# Altium PCB PCB1.PcbDoc
Units mil, origin at the board's own origin, x right, y up, seen from the top; angles counter-clockwise.
Board outline 6000 x 4000 mil, 4 copper layers (Component Side, Ground Plane, Power Plane, Solder Side), stack 33.234 mil thick; 97 components, 107 nets, 611 pads, 29 vias.
Unrouted connection lines stored in the file: 230.
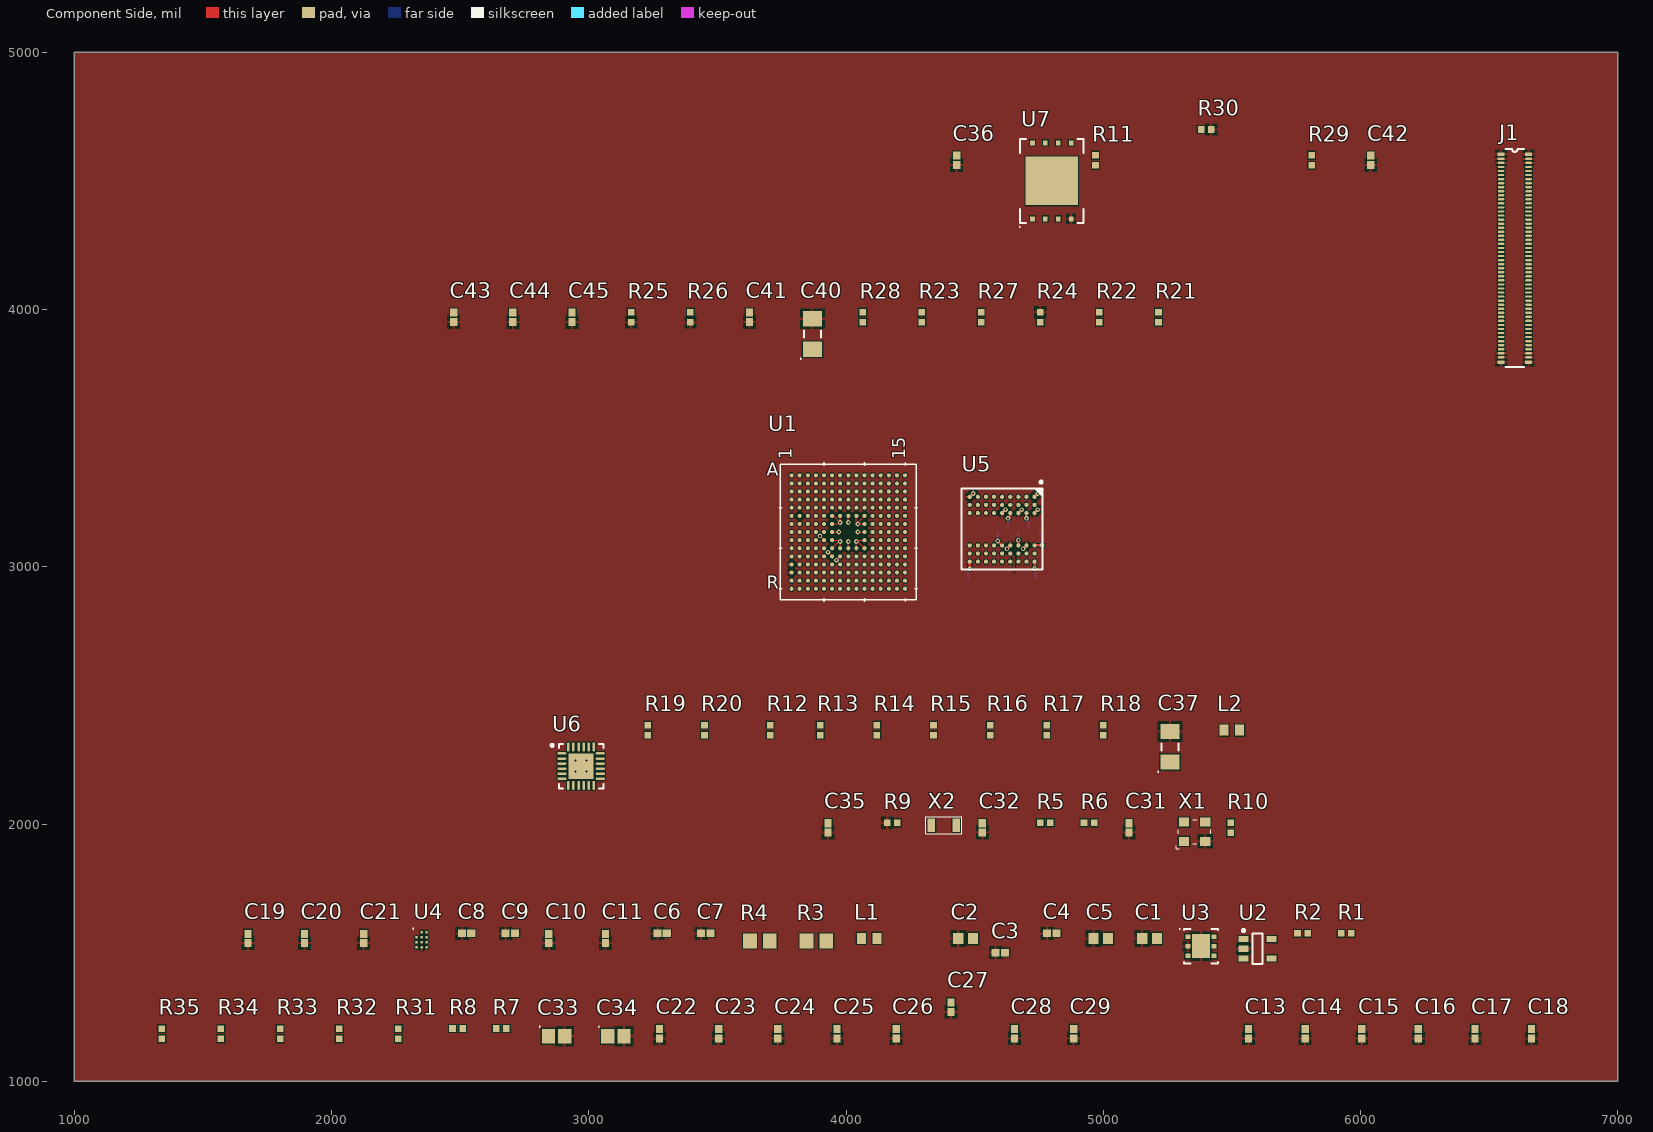
[diagram p0: Component Side view]
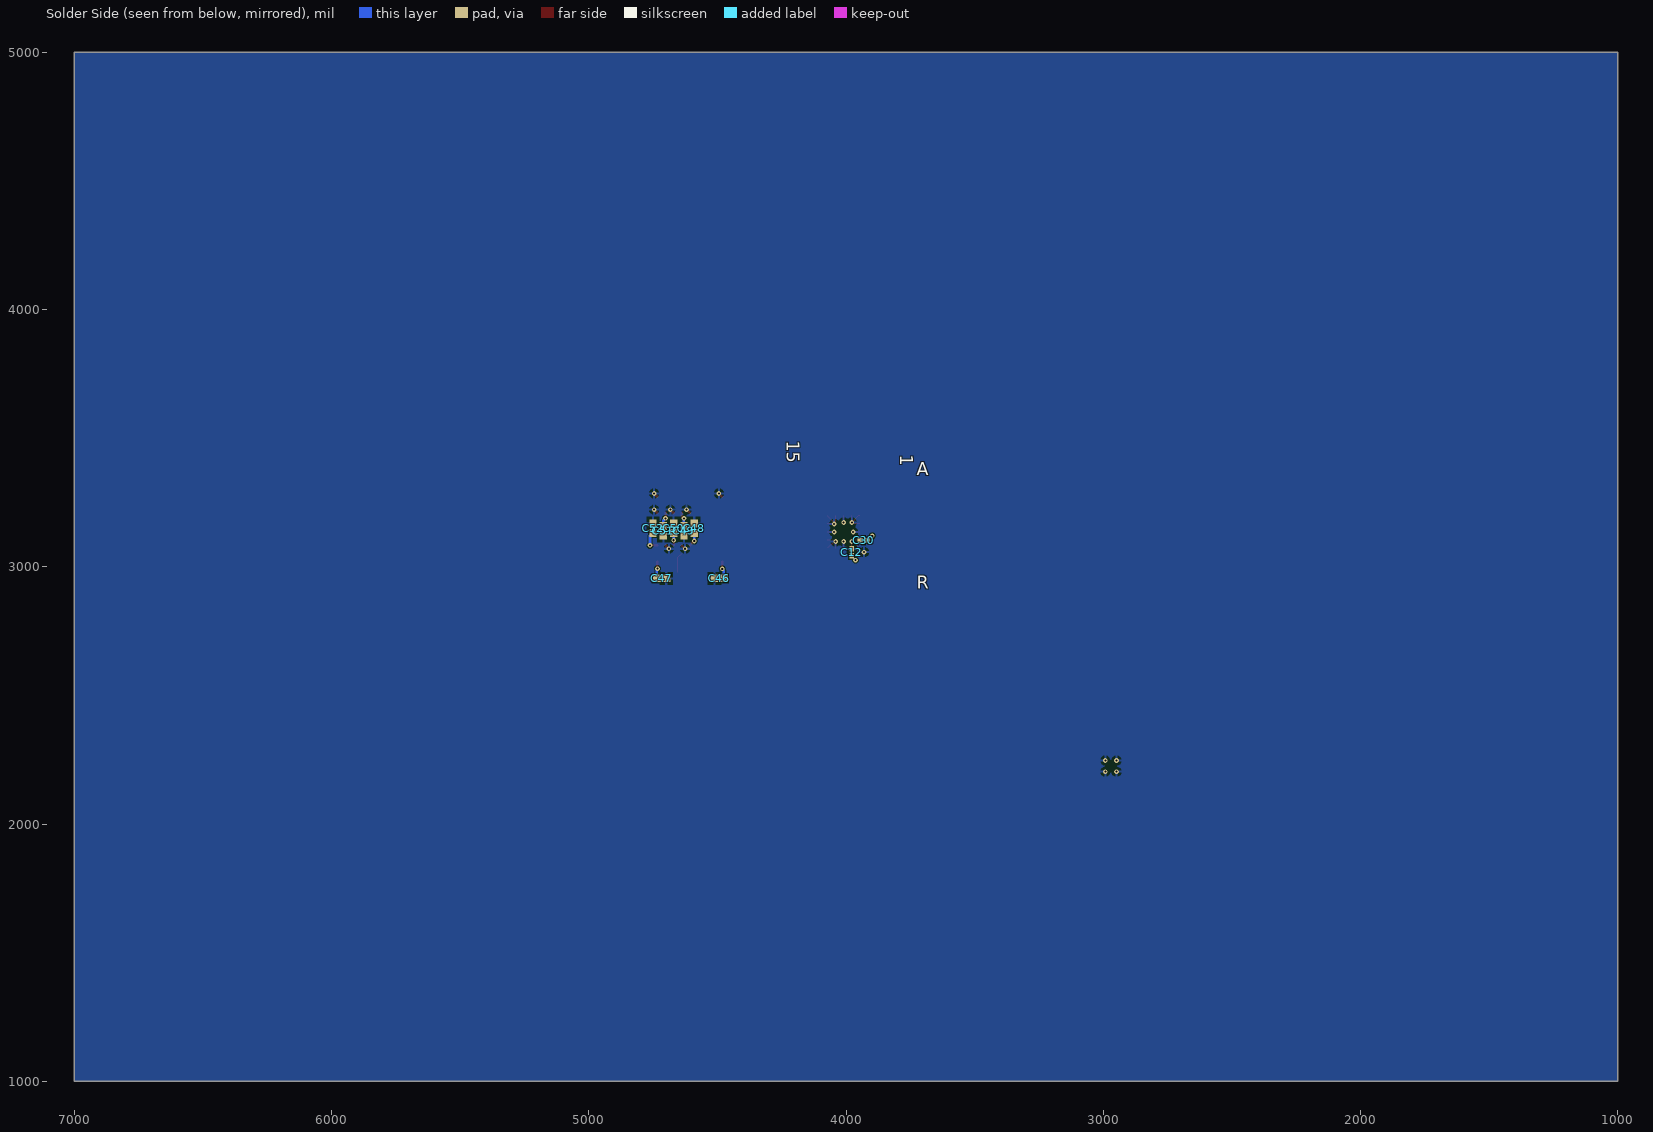
[diagram p1: Solder Side view, seen from below]
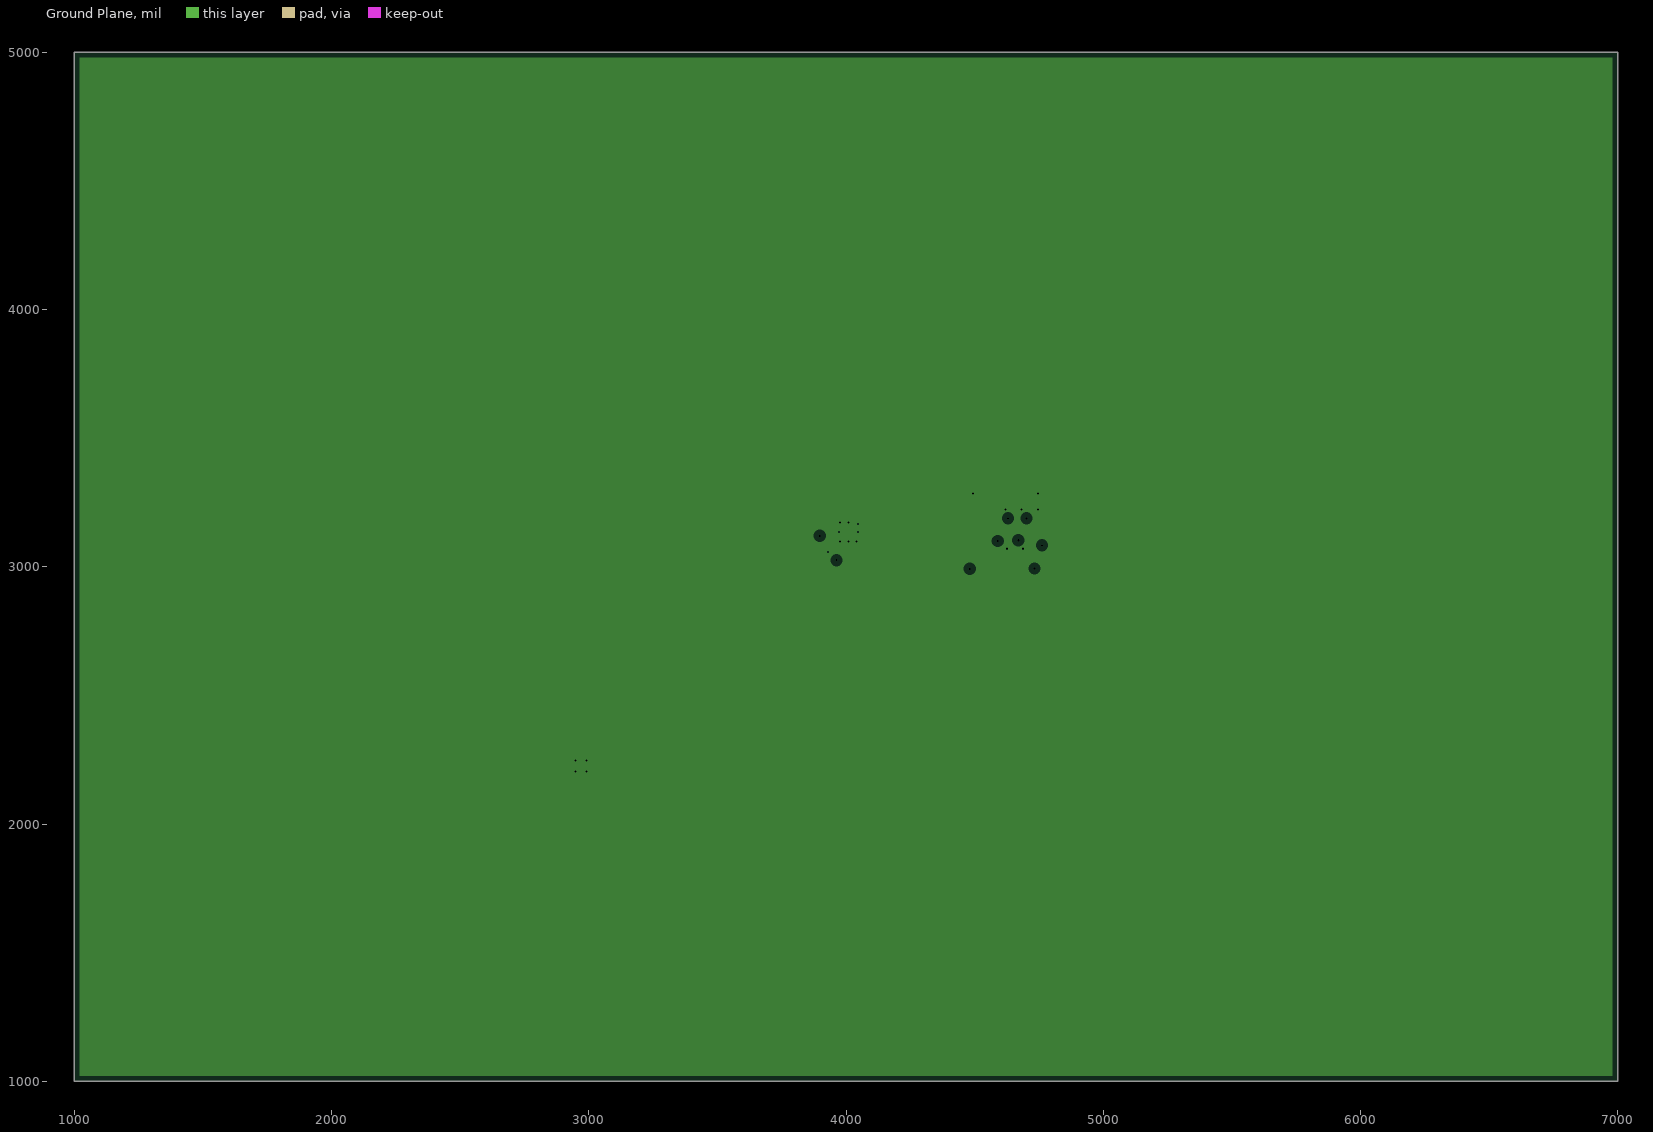
[diagram p2: Ground Plane, clearances drawn from the general rule]
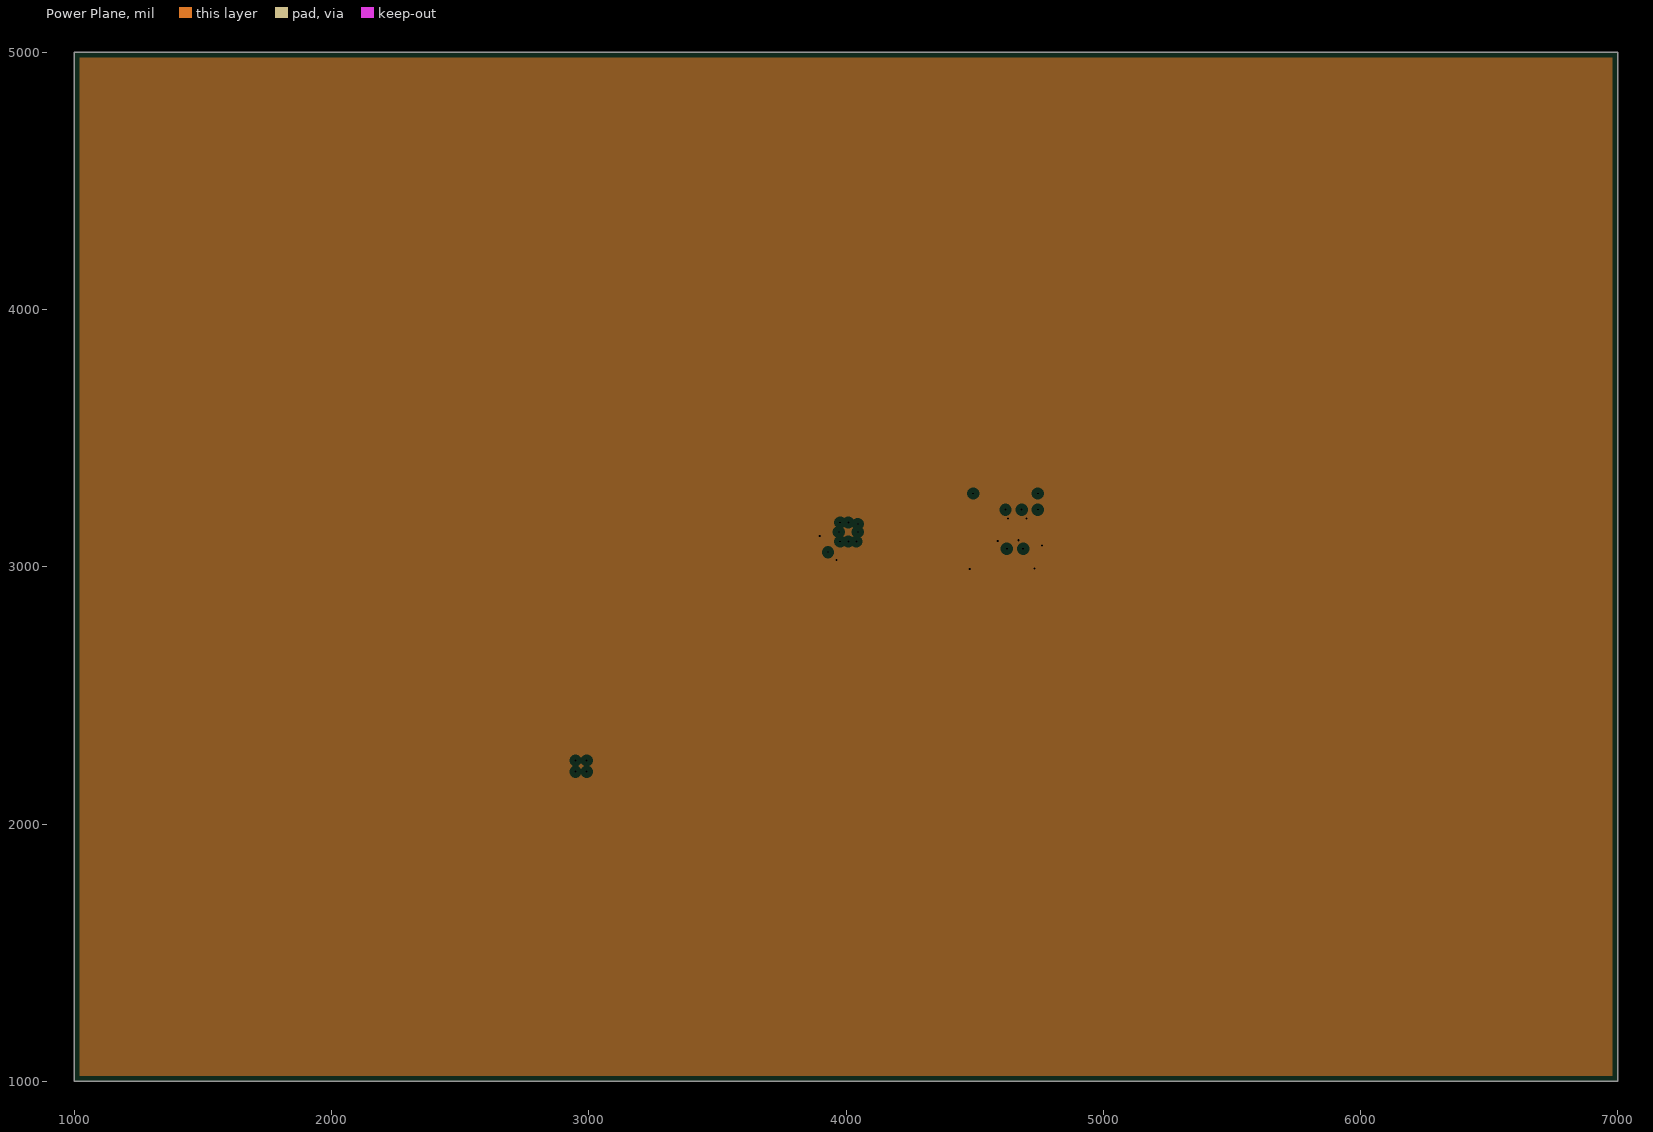
[diagram p3: Power Plane, clearances drawn from the general rule]

## Layer stack, top to bottom
Top Solder: solder mask 0.4, Solder Resist, Dk 3.5
Component Side: signal copper 1.4
Dielectric 1: core 12.6, FR-4, Dk 4.8
Ground Plane: plane copper 1.417, net GND
Dielectric 3: prepreg 5, Dk 4.2
Power Plane: plane copper 1.417, net 3.3V
Dielectric 4: core 10, Dk 4.2
Solder Side: signal copper 1.4
Bottom Solder: solder mask 0.4, Solder Resist, Dk 3.5

## Board outline
1000,1000 7000,1000 7000,5000 1000,5000

## Design rules (kind name [scope] priority, off if disabled: settings)
Clearance Clearance_BGA [WithinRoom('BGA')] p1: gap=4
Clearance [All] p2: gap=4
DiffPairsRouting [All] p1: maxlimit=10 minlimit=10 mostfreqgap=10 toplayer_minwidth=15 toplayer_maxwidth=15 toplayer_prefwidth=15 bottomlayer_minwidth=15 bottomlayer_maxwidth=15 bottomlayer_prefwidth=15 maxuncoupledlength=500
FanoutControl Fanout_BGA [IsBGA] p1: bgadir=Out bgaviamode=Centered fanoutstyle=BGA fanoutdirection=Alternating viagrid=1 // Fanout_BGA (Default Rule)
HoleSize [All] p1: absolutevalues=TRUE maxlimit=100 minlimit=8 maxpercent=80.000 minpercent=20.000
MinimumAnnularRing [All] p1: minimumring=5
MinimumSolderMaskSliver [All] p1: minsoldermaskwidth=4
PlaneClearance [All] p1: clearance=20
PlaneConnect [All] p1: planeconnectstyle=Relief reliefexpansion=20 reliefentries=4 reliefconductorwidth=10 reliefairgap=10
PolygonConnect [All] p1: connectstyle=Relief reliefconductorwidth=10 reliefentries=4 polygonreliefangle="90 Angle" airgapwidth=10
RoomDefinition BGA [InComponentClass('BGA_FANOUT')] p1: confinementstyle=ConfineIn formatcopy=TRUE lockcomponents=FALSE outline 3677,2853 4786,2853 4786,3507 3677,3507
RoutingVias RoutingVias_BGA [WithinRoom('BGA')] p1: holewidth=8 width=18 viastyle="Through Hole" minholewidth=8 minwidth=18 maxholewidth=8 maxwidth=18
RoutingVias [All] p2: holewidth=8 width=18 viastyle="Through Hole" minholewidth=8 minwidth=18 maxholewidth=28 maxwidth=50
SilkToSilkClearance [All] p1: silktosilkclearance=6
SilkToSolderMaskClearance [IsPad] p1: minsilkscreentomaskgap=0 clearancetoexposedcopper=TRUE
SolderMaskExpansion [All] p1: expansion=4
Width Width_BGA [WithinRoom('BGA')] p1: maxlimit=100 minlimit=4 preferedwidth=4
Width [All] p2: maxlimit=100 minlimit=4 preferedwidth=10
22 further rules are at their usual default settings.

## Classes and differential pairs
component class BGA_FANOUT: U1 U5
component class Sheet1: C1 C2 C3 C4 C5 C6 C7 C8 C9 C10 C11 C12 C13 C14 C15 C16 C17 C18 C19 C20 C21 C22 C23 C24 C25 C26 C27 C28 C29 C30 C33 C34 J1 L1 R1 R2 R3 R4 R7 R8 R31 R32 R33 R34 R35 U2 U3 U4
component class Sheet2: C31 C32 C35 R5 R6 R9 R10 U1 X1 X2
component class Sheet3: C36 C37 C40 C41 C42 C43 C44 C45 C46 C47 C48 C49 C50 C51 C52 L2 R11 R12 R13 R14 R15 R16 R17 R18 R19 R20 R21 R22 R23 R24 R25 R26 R27 R28 R29 R30 U5 U6 U7
net class FMC_A[0..12]: FMC_A0 FMC_A1 FMC_A2 FMC_A3 FMC_A4 FMC_A5 FMC_A6 FMC_A7 FMC_A8 FMC_A9 FMC_A10 FMC_A11 FMC_A12
net class FMC_D[0..15]: FMC_D0 FMC_D1 FMC_D2 FMC_D3 FMC_D4 FMC_D5 FMC_D6 FMC_D7 FMC_D8 FMC_D9 FMC_D10 FMC_D11 FMC_D12 FMC_D13 FMC_D14 FMC_D15
differential pair ETH_RX: +ETH_RX_P -ETH_RX_N
differential pair ETH_TX: +ETH_TX_P -ETH_TX_N
differential pair OTG: +OTG_P -OTG_N

## Components (designator, comment, footprint, x,y, rotation, side; value= is the part's Value field where it differs from the comment)
C1 "4.7uF" CAP0603X055M 5180,1555 r0 top
C2 "1uF 16v" CAP0603X055M 4465,1555 r0 top
C3 "100nF" CAP0402X04M 4600,1500 r0 top
C4 "100nF" CAP0402X04M 4800,1575 r0 top
C5 "1uF 16v" CAP0603X055M 4990,1555 r0 top
C6 "1uF" CAP0402X04M 3285,1575 r0 top
C7 "100nF" CAP0402X04M 3455,1575 r0 top
C8 "1uF" CAP0402X04M 2525,1575 r0 top
C9 "100nF" CAP0402X04M 2695,1575 r0 top
C10 "2.2uF" CAP0402X04M 2845,1555 r90 top
C11 "2.2uF" CAP0402X04M 3065,1555 r90 top
C12 "100nF" RES0201X026M#1 3978,3056 r90 bottom
C13 "100nF" CAP0402X04M 5565,1185 r90 top
C14 "100nF" CAP0402X04M 5785,1185 r90 top
C15 "100nF" CAP0402X04M 6005,1185 r90 top
C16 "100nF" CAP0402X04M 6225,1185 r90 top
C17 "100nF" CAP0402X04M 6445,1185 r90 top
C18 "100nF" CAP0402X04M 6665,1185 r90 top
C19 "100nF" CAP0402X04M 1675,1555 r90 top
C20 "100nF" CAP0402X04M 1895,1555 r90 top
C21 "100nF" CAP0402X04M 2125,1555 r90 top
C22 "100nF" CAP0402X04M 3275,1185 r90 top
C23 "100nF" CAP0402X04M 3505,1185 r90 top
C24 "100nF" CAP0402X04M 3735,1185 r90 top
C25 "100nF" CAP0402X04M 3965,1185 r90 top
C26 "100nF" CAP0402X04M 4195,1185 r90 top
C27 "100nF" CAP0402X04M 4408,1288 r90 top
C28 "100nF" CAP0402X04M 4655,1185 r90 top
C29 "100nF" CAP0402X04M 4885,1185 r90 top
C30 "100nF" RES0201X026M#2 3931,3103 r180 bottom
C31 "10nF" CAP0402X04M 5100,1985 r90 top
C32 "4.7pF +-0.25pF" CAP0402X04M 4530,1985 r90 top
C33 "4.7uF" CAPPOL0805X07N 2875,1175 r0 top
C34 "4.7uF" CAPPOL0805X07N 3105,1175 r0 top
C35 "4.7pF +-0.25pF" CAP0402X04M 3930,1985 r90 top
C36 "100nF" CAP0402X04M 4430,4580 r90 top
C37 "10uF" CAPPOL1206X07M 5260,2300 r90 top
C40 "10uF" CAPPOL1206X07M 3870,3905 r90 top
C41 "100nF" CAP0402X04M 3625,3970 r90 top
C42 "470pf" CAP0402X04M 6040,4580 r90 top
C43 "1uF" CAP0402X04M 2475,3970 r90 top
C44 "100nF" CAP0402X04M 2705,3970 r90 top
C45 "100nF" CAP0402X04M 2935,3970 r90 top
C46 "100nF" CAP0402X04M 4493.11,2955 r0 bottom
C47 "100nF" CAP0402X04M 4716.89,2955 r180 bottom
C48 "100nF" CAP0402X04M 4590,3150 r90 bottom
C49 "100nF" CAP0402X04M 4630,3140 r270 bottom
C50 "100nF" CAP0402X04M 4670,3150 r90 bottom
C51 "100nF" CAP0402X04M 4710,3140 r270 bottom
C52 "100nF" CAP0402X04M 4750,3150 r90 bottom
J1 "DF40C-100DP-0.4V(51)" DF40C-100DP-0.4V(51) 6600,4200 r0 top
L1 "BEAD 600 Ohm" IND0603X055M 4090,1555 r0 top
L2 "Bead 120 Ohm" IND0603X055M 5500,2365 r0 top
R1 "47k 1%" RES0402X04M 5945,1575 r0 top
R2 "10k" RES0402X04M 5775,1575 r0 top
R3 "0" RES0805X07M 3885,1545 r0 top
R4 "0" RES0805X07M 3665,1545 r0 top
R5 "10k" RES0402X04M 4775,2005 r0 top
R6 "10k" RES0402X04M 4945,2005 r0 top
R7 "47k 1%" RES0402X04M 2660,1205 r0 top
R8 "47k 1%" RES0402X04M 2490,1205 r0 top
R9 "10k" RES0402X04M 4180,2005 r0 top
R10 "100 1%" RES0402X04M 5495,1985 r90 top
R11 "10k" RES0402X04M 4970,4580 r90 top
R12 "1K5" RES0402X04M 3705,2365 r90 top
R13 "4K7" RES0402X04M 3900,2365 r90 top
R14 "4K7" RES0402X04M 4120,2365 r90 top
R15 "49.9 1%" RES0402X04M 4340,2365 r90 top
R16 "49.9 1%" RES0402X04M 4560,2365 r90 top
R17 "49.9 1%" RES0402X04M 4780,2365 r90 top
R18 "49.9 1%" RES0402X04M 5000,2365 r90 top
R19 "4K7" RES0402X04M 3230,2365 r90 top
R20 "4K7" RES0402X04M 3450,2365 r90 top
R21 "33" RES0402X04M 5215,3970 r90 top
R22 "33" RES0402X04M 4985,3970 r90 top
R23 "33" RES0402X04M 4295,3970 r90 top
R24 "12K1" RES0402X04M 4755,3970 r90 top
R25 "10k" RES0402X04M 3165,3970 r90 top
R26 "10k" RES0402X04M 3395,3970 r90 top
R27 "330" RES0402X04M 4525,3970 r90 top
R28 "330" RES0402X04M 4065,3970 r90 top
R29 "100 1%" RES0402X04M 5810,4580 r90 top
R30 "4K7" RES0402X04M 5400,4700 r180 top
R31 "47k 1%" RES0402X04M 2260,1185 r90 top
R32 "47k 1%" RES0402X04M 2030,1185 r90 top
R33 "47k 1%" RES0402X04M 1800,1185 r90 top
R34 "2K7" RES0402X04M 1570,1185 r90 top
R35 "2K7" RES0402X04M 1340,1185 r90 top
U1 "STM32F74XNXH" TFBGA-216_13X13 4009,3135 r0 top
U2 "STMPS2141STR" SOT95P280X145-5N 5600,1515 r0 top
U3 "LD39050PU33R" LD39050 5380,1525 r0 top
U4 "EMIF02-USB03F2" EMIF02-USB03F2 2350,1550 r0 top
U5 "AS4C16M16SA-6BIN" BGA100P9X9-54A 4607.05,3145.97 r270 top
U6 "LAN8742A-CZ" QFN50P400X400X100_HS-25N 2970,2225 r0 top
U7 "N25Q256A13EF840E" SON127P800X100_HS-9N 4800,4500 r90 top
X1 "OSC 25.0Mhz" OSC_3.2X2.5 5355,1970 r0 top
X2 "32.768k 6pF +-20ppm" CRYSTAL_3.20X1.50 4380,1995 r0 top

## Footprints (in the part's own frame and the unit in brackets; to place one, negate y for a bottom-side part, rotate by r counter-clockwise, add the part's x,y. Pads: shape width x height; smd on the part's side, far side on the other; paste and mask are expansions set on the pad)
BGA100P9X9-54A [mm]
  round 0.41 smd: A1(-3.2,3.2) A2(-2.4,3.2) A3(-1.6,3.2) A7(1.6,3.2) A8(2.4,3.2) A9(3.2,3.2) B1(-3.2,2.4) B2(-2.4,2.4) B3(-1.6,2.4) B7(1.6,2.4) B8(2.4,2.4) B9(3.2,2.4) C1(-3.2,1.6) C2(-2.4,1.6) C3(-1.6,1.6) C7(1.6,1.6) C8(2.4,1.6) C9(3.2,1.6) D1(-3.2,0.8) D2(-2.4,0.8) D3(-1.6,0.8) D7(1.6,0.8) D8(2.4,0.8) D9(3.2,0.8) E1(-3.2,0) E2(-2.4,0) E3(-1.6,0) E7(1.6,0) E8(2.4,0) E9(3.2,0) F1(-3.2,-0.8) F2(-2.4,-0.8) F3(-1.6,-0.8) F7(1.6,-0.8) F8(2.4,-0.8) F9(3.2,-0.8) G1(-3.2,-1.6) G2(-2.4,-1.6) G3(-1.6,-1.6) G7(1.6,-1.6) G8(2.4,-1.6) G9(3.2,-1.6) H1(-3.2,-2.4) H2(-2.4,-2.4) H3(-1.6,-2.4) H7(1.6,-2.4) H8(2.4,-2.4) H9(3.2,-2.4) J1(-3.2,-3.2) J2(-2.4,-3.2) J3(-1.6,-3.2) J7(1.6,-3.2) J8(2.4,-3.2) J9(3.2,-3.2)
  silkscreen extent -4.77,-4 4,4, body extent -4,-4 4,4, height 1.2
CAP0402X04M [mm] "Chip Capacitor, 2-Leads, Body 1.00x0.50mm, IPC Low Density"
  rect 0.8x0.72 smd: 1(-0.46,0) 2(0.46,0)
  body extent -0.53,-0.28 0.53,0.27, height 0.55
CAP0603X055M [mm] "Chip Capacitor, 2-Leads, Body 1.60x0.80mm, IPC Low Density"
  rect 1x1.1 smd: 1(-0.725,0) 2(0.725,0)
  body extent -0.87,-0.48 0.87,0.47, height 0.95
CAPPOL0805X07N [mm] "Chip Capacitor, 2-Leads, Body 2.00x1.25mm, IPC Medium Density"
  rect 1.3x1.45 smd mask+0: 1(-0.8,0) 2(0.8,0)
  silkscreen extent -1.71,0.89 -1.61,0.99, body extent -1.1,-0.72 1.1,0.72, height 1.45
CAPPOL1206X07M [mm] "Chip Capacitor, 2-Leads, Body 3.20x1.60mm, IPC Low Density"
  rect 1.5x1.9 smd: 1(-1.5,0) 2(1.5,0)
  silkscreen extent -2.51,-0.85 0.35,1.21, body extent -1.7,-0.9 1.7,0.9, height 1.8
CRYSTAL_3.20X1.50 [mm]
  rect 0.75x1.3 smd: 1(-1.225,0) 2(1.225,0)
  silkscreen extent -1.8,-0.85 1.8,0.85
DF40C-100DP-0.4V(51) [mm]
  rect 0.66x0.23 smd: 1(-1.355,9.8)
  oval 0.66x0.23 smd: 2(-1.355,9.4) 3(-1.355,9) 4(-1.355,8.6) 5(-1.355,8.2) 6(-1.355,7.8) 7(-1.355,7.4) 8(-1.355,7) 9(-1.355,6.6) 10(-1.355,6.2) 11(-1.355,5.8) 12(-1.355,5.4) 13(-1.355,5) 14(-1.355,4.6) 15(-1.355,4.2) 16(-1.355,3.8) 17(-1.355,3.4) 18(-1.355,3) 19(-1.355,2.6) 20(-1.355,2.2) 21(-1.355,1.8) 22(-1.355,1.4) 23(-1.355,1) 24(-1.355,0.6) 25(-1.355,0.2) 26(-1.355,-0.2) 27(-1.355,-0.6) 28(-1.355,-1) 29(-1.355,-1.4) 30(-1.355,-1.8) 31(-1.355,-2.2) 32(-1.355,-2.6) 33(-1.355,-3) 34(-1.355,-3.4) 35(-1.355,-3.8) 36(-1.355,-4.2) 37(-1.355,-4.6) 38(-1.355,-5) 39(-1.355,-5.4) 40(-1.355,-5.8) 41(-1.355,-6.2) 42(-1.355,-6.6) 43(-1.355,-7) 44(-1.355,-7.4) 45(-1.355,-7.8) 46(-1.355,-8.2) 47(-1.355,-8.6) 48(-1.355,-9) 49(-1.355,-9.4) 50(-1.355,-9.8) 51(1.355,-9.8) 52(1.355,-9.4) 53(1.355,-9) 54(1.355,-8.6) 55(1.355,-8.2) 56(1.355,-7.8) 57(1.355,-7.4) 58(1.355,-7) 59(1.355,-6.6) 60(1.355,-6.2) 61(1.355,-5.8) 62(1.355,-5.4) 63(1.355,-5) 64(1.355,-4.6) 65(1.355,-4.2) 66(1.355,-3.8) 67(1.355,-3.4) 68(1.355,-3) 69(1.355,-2.6) 70(1.355,-2.2) 71(1.355,-1.8) 72(1.355,-1.4) 73(1.355,-1) 74(1.355,-0.6) 75(1.355,-0.2) 76(1.355,0.2) 77(1.355,0.6) 78(1.355,1) 79(1.355,1.4) 80(1.355,1.8) 81(1.355,2.2) 82(1.355,2.6) 83(1.355,3) 84(1.355,3.4) 85(1.355,3.8) 86(1.355,4.2) 87(1.355,4.6) 88(1.355,5) 89(1.355,5.4) 90(1.355,5.8) 91(1.355,6.2) 92(1.355,6.6) 93(1.355,7) 94(1.355,7.4) 95(1.355,7.8) 96(1.355,8.2) 97(1.355,8.6) 98(1.355,9) 99(1.355,9.4) 100(1.355,9.8)
  rect 0.66x0.35 smd: 101(-1.355,-10.275) 101(-1.355,10.275) 101(1.355,-10.275) 101(1.355,10.275)
  silkscreen extent -0.92,-10.76 0.92,10.76
EMIF02-USB03F2 [mm] "BGA, 12-Leads, Body 1.44x1.94mmx0.65mm, Pitch 0.50mm Pin A1 Removed"
  round 0.26 smd mask+0.06: A2(0,0.75) A3(0.5,0.75) B1(-0.5,0.25) B2(0,0.25) B3(0.5,0.25) C1(-0.5,-0.25) C2(0,-0.25) C3(0.5,-0.25) D1(-0.5,-0.75) D2(0,-0.75) D3(0.5,-0.75)
  silkscreen extent -0.87,1.03 -0.77,1.12, body extent -1.22,-1.22 0.22,0.72, height 0.65
IND0603X055M [mm] "Chip Inductor, 2-Leads, Body 1.60x0.80mm, IPC Low Density"
  rect 0.87x1.08 smd: 1(-0.765,0) 2(0.765,0)
  body extent -0.87,-0.48 0.87,0.47, height 0.95
LD39050 [mm] "SON, 6-Leads, Body 3.00x3.00mm, Pitch 0.95mm, Thermal Pad 2.37x1.49mm, IPC Medium Density"
  rect 0.5x0.45 smd mask+0: 1(-1.3,0.95) 2(-1.3,0) 3(-1.3,-0.95) 4(1.3,-0.95) 5(1.3,0) 6(1.3,0.95)
  rect 1.75x2.37 smd mask+0: 7(0,0)
  silkscreen extent -2.15,-1.7 1.7,1.75, body extent -1.55,-1.55 1.55,1.55, height 1
OSC_3.2X2.5 [mm]
  rect 1x0.9 smd: 1(-1.05,-0.95) 2(1.05,-0.95) 3(1.05,0.95) 4(-1.05,0.95)
  silkscreen extent -1.8,-1.7 1.6,1.2
QFN50P400X400X100_HS-25N [mm] "QFN, 24-Leads, Body 4.00x4.00mm, Pitch 0.50mm, Thermal Pad 2.50x2.50mm, IPC Medium Density"
  oval 0.9x0.25 smd mask+0: 1(-1.9,1.25) 2(-1.9,0.75) 3(-1.9,0.25) 4(-1.9,-0.25) 5(-1.9,-0.75) 6(-1.9,-1.25) 13(1.9,-1.25) 14(1.9,-0.75) 15(1.9,-0.25) 16(1.9,0.25) 17(1.9,0.75) 18(1.9,1.25)
  oval 0.25x0.9 smd mask+0: 7(-1.25,-1.9) 8(-0.75,-1.9) 9(-0.25,-1.9) 10(0.25,-1.9) 11(0.75,-1.9) 12(1.25,-1.9) 19(1.25,1.9) 20(0.75,1.9) 21(0.25,1.9) 22(-0.25,1.9) 23(-0.75,1.9) 24(-1.25,1.9)
  rect 2.5x2.5 smd mask+0: 25(0,0)
  silkscreen extent -2.97,-2.2 2.2,2.2, body extent -2.05,-2.05 2.05,2.05, height 1
RES0201X026M#1 [mm] "Chip Resistor, 2-Leads, Body 0.60x0.30mm, IPC Low Density"
  rect 0.55x0.45 smd: 1(0.35,0) 2(-0.35,0)
  body extent -0.32,-0.16 0.31,0.17, height 0.26
RES0201X026M#2 [mm] "Chip Resistor, 2-Leads, Body 0.60x0.30mm, IPC Low Density"
  rect 0.55x0.45 smd: 1(-0.35,0) 2(0.35,0)
  body extent -0.31,-0.16 0.32,0.17, height 0.26
RES0402X04M [mm] "Chip Resistor, 2-Leads, Body 1.00x0.50mm, IPC Low Density"
  rect 0.65x0.65 smd: 1(-0.5,0) 2(0.5,0)
  body extent -0.53,-0.27 0.53,0.28, height 0.4
RES0805X07M [mm] "Chip Resistor, 2-Leads, Body 2.00x1.25mm, IPC Low Density"
  rect 1.35x1.45 smd: 1(-0.975,0) 2(0.975,0)
  body extent -1.1,-0.67 1.1,0.67, height 0.7
SON127P800X100_HS-9N [mm] "SON, 8-Leads, Body 6.00x8.00mm, Pitch 1.27mm, Thermal Pad 2.37x1.49mm, IPC Medium Density"
  rect 0.5x0.45 smd: 1(-3.75,1.905) 2(-3.75,0.635) 3(-3.75,-0.635) 4(-3.75,-1.905) 5(3.75,-1.905) 6(3.75,-0.635) 7(3.75,0.635) 8(3.75,1.905)
  rect 4.8x5.16 smd: 9(0,0)
  silkscreen extent -4.6,-3.15 4.15,3.2, body extent -4,-3 4,3, height 1
SOT95P280X145-5N [mm] "SOT23, 5-Leads, Body 2.90x2.80mm, Pitch 0.95mm, IPC Medium Density"
  rect 1x0.6 smd: 1(-1.375,0.95) 2(-1.375,0) 3(-1.375,-0.95) 4(1.375,-0.95) 5(1.375,0.95)
  silkscreen extent -1.5,-1.5 0.5,1.92, body extent -0.88,-1.5 0.87,1.5, height 1.45
TFBGA-216_13X13 [mm]
  round 0.4 smd paste-0.2 mask+0.038: A1(-5.601,5.6) A2(-4.801,5.6) A3(-4,5.6) A4(-3.2,5.6) A5(-2.4,5.6) A6(-1.6,5.6) A7(-0.8,5.6) A8(0,5.6) A9(0.8,5.6) A10(1.6,5.6) A11(2.4,5.6) A12(3.2,5.6) A13(4,5.6) A14(4.801,5.6) A15(5.601,5.6) B1(-5.601,4.8) B2(-4.801,4.8) B3(-4,4.8) B4(-3.2,4.8) B5(-2.4,4.8) B6(-1.6,4.8) B7(-0.8,4.8) B8(0,4.8) B9(0.8,4.8) B10(1.6,4.8) B11(2.4,4.8) B12(3.2,4.8) B13(4,4.8) B14(4.801,4.8) B15(5.601,4.8) C1(-5.601,4) C2(-4.801,4) C3(-4,4) C4(-3.2,4) C5(-2.4,4) C6(-1.6,4) C7(-0.8,4) C8(0,4) C9(0.8,4) C10(1.6,4) C11(2.4,4) C12(3.2,4) C13(4,4) C14(4.801,4) C15(5.601,4) D1(-5.601,3.2) D2(-4.801,3.2) D3(-4,3.2) D4(-3.2,3.2) D5(-2.4,3.2) D6(-1.6,3.2) D7(-0.8,3.2) D8(0,3.2) D9(0.8,3.2) D10(1.6,3.2) D11(2.4,3.2) D12(3.2,3.2) D13(4,3.2) D14(4.801,3.2) D15(5.601,3.2) E1(-5.601,2.4) E2(-4.801,2.4) E3(-4,2.4) E4(-3.2,2.4) E5(-2.4,2.4) E6(-1.6,2.4) E7(-0.8,2.4) E8(0,2.4) E9(0.8,2.4) E10(1.6,2.4) E11(2.4,2.4) E12(3.2,2.4) E13(4,2.4) E14(4.801,2.4) E15(5.601,2.4) F1(-5.601,1.6) F2(-4.801,1.6) F3(-4,1.6) F4(-3.2,1.6) F5(-2.4,1.6) F6(-1.6,1.6) F7(-0.8,1.6) F8(0,1.6) F9(0.8,1.6) F10(1.6,1.6) F11(2.4,1.6) F12(3.2,1.6) F13(4,1.6) F14(4.801,1.6) F15(5.601,1.6) G1(-5.601,0.8) G2(-4.801,0.8) G3(-4,0.8) G4(-3.2,0.8) G5(-2.4,0.8) G6(-1.6,0.8) G10(1.6,0.8) G11(2.4,0.8) G12(3.2,0.8) G13(4,0.8) G14(4.801,0.8) G15(5.601,0.8) H1(-5.601,0) H2(-4.801,0) H3(-4,0) H4(-3.2,0) H5(-2.4,0) H6(-1.6,0) H10(1.6,0) H11(2.4,0) H12(3.2,0) H13(4,0) H14(4.801,0) H15(5.601,0) J1(-5.601,-0.8) J2(-4.801,-0.8) J3(-4,-0.8) J4(-3.2,-0.8) J5(-2.4,-0.8) J6(-1.6,-0.8) J10(1.6,-0.8) J11(2.4,-0.8) J12(3.2,-0.8) J13(4,-0.8) J14(4.801,-0.8) J15(5.601,-0.8) K1(-5.601,-1.6) K2(-4.801,-1.6) K3(-4,-1.6) K4(-3.2,-1.6) K5(-2.4,-1.6) K6(-1.6,-1.6) K7(-0.8,-1.6) K8(0,-1.6) K9(0.8,-1.6) K10(1.6,-1.6) K11(2.4,-1.6) K12(3.2,-1.6) K13(4,-1.6) K14(4.801,-1.6) K15(5.601,-1.6) L1(-5.601,-2.4) L2(-4.801,-2.4) L3(-4,-2.4) L4(-3.2,-2.4) L5(-2.4,-2.4) L6(-1.6,-2.4) L7(-0.8,-2.4) L8(0,-2.4) L9(0.8,-2.4) L10(1.6,-2.4) L11(2.4,-2.4) L12(3.2,-2.4) L13(4,-2.4) L14(4.801,-2.4) L15(5.601,-2.4) M1(-5.601,-3.2) M2(-4.801,-3.2) M3(-4,-3.2) M4(-3.2,-3.2) M5(-2.4,-3.2) M6(-1.6,-3.2) M7(-0.8,-3.2) M8(0,-3.2) M9(0.8,-3.2) M10(1.6,-3.2) M11(2.4,-3.2) M12(3.2,-3.2) M13(4,-3.2) M14(4.801,-3.2) M15(5.601,-3.2) N1(-5.601,-4) N2(-4.801,-4) N3(-4,-4) N4(-3.2,-4) N5(-2.4,-4) N6(-1.6,-4) N7(-0.8,-4) N8(0,-4) N9(0.8,-4) N10(1.6,-4) N11(2.4,-4) N12(3.2,-4) N13(4,-4) N14(4.801,-4) N15(5.601,-4) P1(-5.601,-4.8) P2(-4.801,-4.8) P3(-4,-4.8) P4(-3.2,-4.8) P5(-2.4,-4.8) P6(-1.6,-4.8) P7(-0.8,-4.8) P8(0,-4.8) P9(0.8,-4.8) P10(1.6,-4.8) P11(2.4,-4.8) P12(3.2,-4.8) P13(4,-4.8) P14(4.801,-4.8) P15(5.601,-4.8) R1(-5.601,-5.6) R2(-4.801,-5.6) R3(-4,-5.6) R4(-3.2,-5.6) R5(-2.4,-5.6) R6(-1.6,-5.6) R7(-0.8,-5.6) R8(0,-5.6) R9(0.8,-5.6) R10(1.6,-5.6) R11(2.4,-5.6) R12(3.2,-5.6) R13(4,-5.6) R14(4.801,-5.6) R15(5.601,-5.6)
  silkscreen extent -6.83,-6.83 6.83,6.83, body extent -6.58,-6.58 6.58,6.58, height 1.09

## Part data
C1: library part CL10A475MP5LNNC, "CAP CER 4.7UF 10V X5R 0603"
C2 C5: library part CC0603ZRY5V7BB105, "CAP CER 1UF 16V Y5V 0603"
C3 C4 C7 C9 C12 C13 C14 C15 C16 C17 C18 C19 C20 C21 C22 C23 C24 C25 C26 C27 C28 C29 C30 C36 C41 C44 C45 C46 C47 C48 C49 C50 C51 C52: library part GRM155R71C104KA88J, "CAP CER 0.1UF 16V X7R 0402"
C6 C8 C43: library part GRM155R60J105KE19D, "CAP CER 1UF 6.3V X5R 0402"
C10 C11: library part 04026D225KAT2A, "CAP CER 2.2UF 6.3V X5R 0402"
C31: library part GRM155R71H103KA88D, "CAP CER 10000PF 50V X7R 0402"
C32 C35: library part CL05C4R7CB5NNNC, "CAP CER 4.7PF 50V NP0 0402"
C33 C34: library part F921A475MPA, "CAP TANT 4.7UF 10V 20% 0805"
C37 C40: library part 293D106X9010A2TE3, "CAP TANT 10UF 10V 10% 1206"
C42: library part CL05B471KB5NNNC, "CAP CER 470PF 50V X7R 0402"
J1: "CONN HDR 100POS 0.4MM SMD GOLD"
L1: library part BK1608HW601-T, "FERRITE BEAD 600 OHM 0603 1LN"
L2: library part BLM18PG121SN1D, "FERRITE BEAD 120 OHM 0603 1LN"
R1 R7 R8 R31 R32 R33: library part ERJ-2RKF4702X, "RES SMD 47K OHM 1% 1/10W 0402"
R2 R5 R6 R9 R11 R25 R26: library part RC0402FR-0710KL, "RES SMD 10K OHM 1% 1/16W 0402"
R3 R4: library part RC0805JR-070RL, "RES SMD 0.0 OHM JUMPER 1/8W 0805"
R10 R29: library part RC0402FR-07100RL, "RES SMD 100 OHM 1% 1/16W 0402"
R12: library part ERJ-2RKF1501X, "RES SMD 1.5K OHM 1% 1/10W 0402"
R13 R14 R19 R20 R30: library part ERJ-2RKF4701X, "RES SMD 4.7K OHM 1% 1/10W 0402"
R15 R16 R17 R18: library part RC0402FR-0749R9L, "RES SMD 49.9 OHM 1% 1/16W 0402"
R21 R22 R23: library part ERJ-2RKF33R0X, "RES SMD 33 OHM 1% 1/10W 0402"
R24: library part ERJ-2RKF1212X, "RES SMD 12.1K OHM 1% 1/10W 0402"
R27 R28: library part ERJ-2RKF3300X, "RES SMD 330 OHM 1% 1/10W 0402"
R34 R35: library part ERJ-2RKF2701X, "RES SMD 2.7K OHM 1% 1/10W 0402"
U1: "Imported"
U2: "IC PWR SWITCH 1CH 500MA SOT23-5"
U3: "IC REG LDO 3.3V 0.5A 6DFN"
U4: "FILTER RC(PI) 33 OHM/20PF SMD"
U5: "IC SDRAM 256MBIT 166MHZ 54BGA"
U6: "IC TXRX ETHERNET 100MBPS 24QFN"
U7: "IC FLASH 256MBIT 108MHZ 8VPDFN"
X1: library part ASEMB-25.000MHZ-LC-T, "OSC MEMS 25.000MHZ CMOS SMD"
X2: library part NX3215SA-32.768K-STD-MUA-14, "CRYSTAL 32.7680KHZ 6PF SMD"

## Via types
v1: diameter 18, hole 8, Component Side to Solder Side, tented both sides, 24 vias
v2: diameter 18, hole 8, Component Side to Solder Side, 5 vias

## Nets (pads, with @x,y where several pads share a name; then routed paths per layer and width w, separated by ;. In a path a pad name is that pad's centre, name@x,y a point inside that pad or via, vN(x,y) a via of type N, cw(c..) or ccw(c..) an arc to the next point about the centre after c; other vN are vias at no path point)
3.3V: C4.2 C5.2 C12.2 C13.2 C14.2 C15.2 C16.2 C17.2 C18.2 C19.2 C20.2 C21.2 C22.2 C23.2 C24.2 C25.2 C26.2 C27.2 C28.2 C29.2 C30.2 C31.2 C33.1 C34.1 C36.2 C40.1 C41.2 C46.1 C47.1 C48.1 C49.1 C50.1 C51.1 C52.1 J1.3 J1.4 L1.2 L2.1 R1.2 R2.2 R3.2 R5.2 R6.2 R7.2 R8.2 R11.2 R12.2 R13.2 R14.2 R19.2 R20.2 R31.2 R32.2 R33.2 R34.2 R35.2 U1.E7 U1.E8 U1.E9 U1.E10 U1.F4 U1.F5 U1.F11 U1.G5 U1.G11 U1.H5 U1.H11 U1.J5 U1.J11 U1.K5 U1.K11 U1.L7 U1.L8 U1.L9 U1.L10 U3.4 U5.A7 U5.A9 U5.B3 U5.C7 U5.D3 U5.E7 U5.J9 U6.9 U7.8 X1.1 X1.4 | length 522.3
  Component Side w4: v1(3898,3120) U1.J5 ; v1(3962.99,3026) U1.L7
  Component Side w10: v1(4481.07,2992.07) U5.J9 ; v1(4590,3100.03) U5.E7 ; v1(4630,3188.11) 4638.55,3196.65 U5.D3 ; v1(4670,3103) v1(4670,3103) U5.C7 ; v1(4701.54,3188.46) U5.B3 ; v1(4733.04,2992.96) U5.A9 ; U5.A7 v2(4761.98,3082.98)
  Solder Side w4: v1(3898,3120) 3900.22,3120 C30.2 ; v1(3962.99,3026) 3978,3041.01 C12.2
  Solder Side w10: C46.1 4475,2986 v1(4481.07,2992.07) ; v1(4590,3100.03) C48.1 ; C49.1 v1(4630,3188.11) ; v1(4670,3103) C50.1 ; v1(4701.54,3188.46) 4710,3180 C51.1 ; v1(4733.04,2992.96) 4735,2991 C47.1 ; C52.1 4761.98,3119.91 v2(4761.98,3082.98)
5V: C2.2 C3.2 J1.53 J1.54 U2.5 U3.6
5V_OTG: C1.2 J1.5 J1.6 U2.1
5V_REG_EN: J1.9 U3.1
BOOT0: J1.10 U1.E6
BUTTON: J1.13 U1.F3
ETH_GREEN: J1.96 R28.1
ETH_RX_N: J1.48 R18.1 U6.22
ETH_RX_P: J1.47 R17.1 U6.23
ETH_TX_N: J1.98 R16.1 U6.20
ETH_TX_P: J1.97 R15.1 U6.21
ETH_YELLOW: J1.46 R27.1
FMC_A0: U1.D2 U5.H7
FMC_A1: U1.E2 U5.H8
FMC_A2: U1.G2 U5.J8
FMC_A3: U1.H2 U5.J7
FMC_A4: U1.J2 U5.J3
FMC_A5: U1.K3 U5.J2
FMC_A6: U1.M6 U5.H3
FMC_A7: U1.N6 U5.H2
FMC_A8: U1.P6 U5.H1
FMC_A9: U1.M8 U5.G3
FMC_A10: U1.N7 U5.H9
FMC_A11: U1.M7 U5.G2
FMC_A12: U1.M13 U5.G1
FMC_BA0: U1.N12 U5.G7
FMC_BA1: U1.N11 U5.G8
FMC_D0: U1.L12 U5.A8
FMC_D1: U1.K13 U5.B9
FMC_D2: U1.B12 U5.B8
FMC_D3: U1.C12 U5.C9
FMC_D4: U1.R8 U5.C8
FMC_D5: U1.N9 U5.D9
FMC_D6: U1.P9 U5.D8 | length 78.9
  Component Side w4: U5.D8 4654,3036.03 4654,2979
FMC_D7: U1.R9 U5.E9
FMC_D8: U1.P10 U5.E1
FMC_D9: U1.R10 U5.D2
FMC_D10: U1.R12 U5.D1
FMC_D11: U1.P11 U5.C2
FMC_D12: U1.R11 U5.C1
FMC_D13: U1.L15 U5.B2
FMC_D14: U1.L14 U5.B1
FMC_D15: U1.K15 U5.A2
FMC_NBL0: U1.A6 U5.E8
FMC_NBL1: U1.A5 U5.F1
FMC_SDCKE0: U1.L4 U5.F2
FMC_SDCLK: U1.H14 U5.F3
FMC_SDNCAS: U1.B7 U5.F7
FMC_SDNE0: U1.J4 U5.G9
FMC_SDNRAS: U1.P8 U5.F8
FMC_SDNWE: U1.J3 U5.F9
GND: C1.1 C2.1 C3.1 C4.1 C5.1 C6.1 C7.1 C8.1 C9.1 C10.1 C11.1 C12.1 C13.1 C14.1 C15.1 C16.1 C17.1 C18.1 C19.1 C20.1 C21.1 C22.1 C23.1 C24.1 C25.1 C26.1 C27.1 C28.1 C29.1 C30.1 C31.1 C32.1 C33.2 C34.2 C35.1 C36.1 C37.2 C40.2 C41.1 C42.1 C43.1 C44.1 C45.1 C46.2 C47.2 C48.2 C49.2 C50.2 C51.2 C52.2 J1.1 J1.2 J1.49 J1.50 J1.51 J1.52 J1.99 J1.100 J1.101 R9.1 R24.2 R25.1 R26.1 R30.1 U1.F2 U1.F6 U1.F7 U1.F8 U1.F9 U1.F10 U1.G6 U1.G10 U1.H6 U1.H10 U1.J6 U1.J10 U1.K6 U1.K7 U1.K8 U1.K9 U1.K10 U1.L6 U1.M1 U1.N1 U2.2 U3.2 U3.7 U4.D2 U5.A1 U5.A3 U5.B7 U5.C3 U5.D7 U5.E3 U5.J1 U6.25 U7.4 X1.2 | length 662.1
  Component Side w4: v1(3930,3057) 3930,3056.51 U1.L6 ; U1.K6 3971.99,3098 v1(3977.5,3098) ; U1.J6 3972,3103.5 v1(3977.5,3098) ; U1.H6 v1(3971.99,3135) ; U1.G6 3972,3166.5 v1(3977.5,3172) ; U1.F6 3951.51,3197.99 v1(3977.5,3172) ; U1.K7 v1(3977.5,3098) ; U1.F7 v1(3977.5,3172) ; U1.K8 v1(4009,3098) ; v1(4009,3172) U1.F8 ; U1.K9 v1(4040.5,3098) ; v1@4040.5,3172 U1.F9 ; v1(4046.01,3135) U1.H10 ; U1.K10 4046.01,3098 v1(4040.5,3098) ; U1.J10 4046,3103.5 v1(4040.5,3098) ; U1.G10 v1(4046.01,3166.5) 4046.01,3172 U1.F10
  Component Side w10: U5.J1 v1(4494.1,3284.98) ; U5.E3 v1(4620.08,3221.99) ; v1(4625.52,3069.95) U5.D7 ; U5.C3 v1(4683.07,3221.99) ; v1(4688.51,3069.95) U5.B7 ; U5.A3 v1(4746.06,3221.99) ; U5.A1 v1(4746.06,3284.98)
  Solder Side w4: v1@3926,3061 v1(3930,3057)
  other v2: 2948.35,2203.35 2991.65,2203.35 2948.35,2246.65 2991.65,2246.65
NetC10_2: C10.2 U1.E11
NetC11_2: C11.2 U1.L11
NetC42_2: C42.2 C43.2 U6.6
NetR6_1: R6.1 U1.E5
NetR9_2: R9.2 U1.L5
NetR10_2: R10.2 U1.B10
NetR13_1: R13.1 R21.2 U6.8
NetR14_1: R14.1 R23.2 U6.11
NetR20_1: R20.1 R22.2 U6.7
NetR24_1: R24.1 U6.24
NetR25_2: R25.2 R27.2 U6.3
NetR26_2: R26.2 R28.2 U6.2
NetR29_2: R29.2 U6.5
NRST: J1.60 R5.1 U1.J1 U6.15
OSC32_IN: C32.2 U1.E1 X2.1
OSC32_OUT: C35.2 U1.F1 X2.2
OSC_25M: R29.1 U1.G1 X1.3
OTG_ID: J1.59 U1.D15 U4.A3
OTG_N: J1.58 U1.C15 U4.D1 U4.D3
OTG_P: J1.57 U1.B15 U4.C1 U4.C3
OTG_PWR_EN: R2.1 U1.C10 U2.4
OTG_PWR_FAULT: R1.1 U1.D11 U2.3
OTG_VBUS: J1.55 J1.56 R10.1 U4.B3
QSPI_CLK: U1.M5 U7.6
QSPI_D0: U1.N10 U7.5
QSPI_D1: U1.M10 U7.2
QSPI_D2: U1.A3 U7.3
QSPI_D3: U1.M11 U7.7
QSPI_NCS: R11.1 U1.B6 U7.1
RMII_CLK: R19.1 U1.N2 U6.14
RMII_CRS_DV: R23.1 U1.R3
RMII_MDC: U1.M3 U6.13
RMII_MDIO: R12.1 U1.P2 U6.12
RMII_RXD0: R21.1 U1.N5
RMII_RXD1: R22.1 U1.P5
RMII_RXER: R30.2 U1.J15 U6.10
RMII_TXD0: U1.B3 U6.17
RMII_TXD1: U1.A4 U6.18
RMII_TXEN: U1.B8 U6.16
SCL: J1.15 R35.1 U1.A7
SDA: J1.14 R34.1 U1.B4
SWDCLK: J1.61 U1.A14
SWDIO: J1.11 U1.A15
SWO: J1.12 U1.A10
USD_CLK: J1.66 U1.A12
USD_CMD: U1.D12
USD_D0: J1.62 R7.1 U1.G14
USD_D1: J1.63 R8.1 U1.F14
USD_D2: J1.64 R31.1 U1.B14
USD_D3: J1.65 R32.1 U1.B13
USD_DETECT: J1.67 R33.1 U1.D1
VBAT: J1.7 R3.1 U1.C1
VDDA: C6.2 C7.2 L1.1 R4.2 U1.R1
VDDA_ETH: C37.1 C44.2 C45.2 L2.2 R15.2 R16.2 R17.2 R18.2 U6.1 U6.19
VREF+: C8.2 C9.2 J1.8 R4.1 U1.P1
pads on no net: J1.16 J1.17 J1.18 J1.19 J1.20 J1.21 J1.22 J1.23 J1.24 J1.25 J1.26 J1.27 J1.28 J1.29 J1.30 J1.31 J1.32 J1.33 J1.34 J1.35 J1.36 J1.37 J1.38 J1.39 J1.40 J1.41 J1.42 J1.43 J1.44 J1.45 J1.68 J1.69 J1.70 J1.71 J1.72 J1.73 J1.74 J1.75 J1.76 J1.77 J1.78 J1.79 J1.80 J1.81 J1.82 J1.83 J1.84 J1.85 J1.86 J1.87 J1.88 J1.89 J1.90 J1.91 J1.92 J1.93 J1.94 J1.95 U1.A1 U1.A2 U1.A8 U1.A9 U1.A11 U1.A13 U1.B1 U1.B2 U1.B5 U1.B9 U1.B11 U1.C2 U1.C3 U1.C4 U1.C5 U1.C6 U1.C7 U1.C8 U1.C9 U1.C11 U1.C13 U1.C14 U1.D3 U1.D4 U1.D5 U1.D6 U1.D7 U1.D8 U1.D9 U1.D10 U1.D13 U1.D14 U1.E3 U1.E4 U1.E12 U1.E13 U1.E14 U1.E15 U1.F12 U1.F13 U1.F15 U1.G3 U1.G4 U1.G12 U1.G13 U1.G15 U1.H1 U1.H3 U1.H4 U1.H12 U1.H13 U1.H15 U1.J12 U1.J13 U1.J14 U1.K1 U1.K2 U1.K4 U1.K12 U1.K14 U1.L1 U1.L2 U1.L3 U1.L13 U1.M2 U1.M4 U1.M9 U1.M12 U1.M14 U1.M15 U1.N3 U1.N4 U1.N8 U1.N13 U1.N14 U1.N15 U1.P3 U1.P4 U1.P7 U1.P12 U1.P13 U1.P14 U1.P15 U1.R2 U1.R4 U1.R5 U1.R6 U1.R7 U1.R13 U1.R14 U1.R15 U3.3 U3.5 U4.A2 U4.B1 U4.B2 U4.C2 U5.E2 U6.4 U7.9

## Polygon pours and split planes (outlines as drawn)
GND on Component Side "Component Side-No Net" (solid, remove dead copper, pour order 2): 1000,5000 1000,1000 7000,1000 7000,5000 1000,5000
GND on Solder Side "Component Side-No Net" (solid, remove dead copper, pour order 4): 1000,5000 7000,5000 7000,1000 1000,1000 1000,5000
3.3V on Power Plane (split plane): 6979.9,1020.1 1020.1,1020.1 1020.1,4979.9 6979.9,4979.9
GND on Ground Plane (split plane): 6979.9,1020.1 1020.1,1020.1 1020.1,4979.9 6979.9,4979.9

## Text inside footprints (layer, text, board x,y; h text height)
U1: Top Overlay "A" at 3691.09,3354.49 h50; Top Overlay "R" at 3691,2914 h50; Top Overlay "1" at 3788.5,3418.86 h50 r90; Top Overlay "15" at 4229.5,3418.86 h50 r90; Bottom Overlay "A" at 3725.14,3355.47 h50; Bottom Overlay "R" at 3725.14,2914.53 h50; Bottom Overlay "1" at 3788.53,3436.18 h50 r90; Bottom Overlay "15" at 4230.46,3489.33 h50 r90; Mechanical 13 "A" at 3690.1,3354.49 h50; Mechanical 13 "R" at 3698.96,2914.53 h50; Mechanical 13 "1" at 3788.5,3418.86 h50 r90; Mechanical 13 "15" at 4229.5,3418.86 h50 r90